# EAGLE board untitled (EAGLE 7.2.0)
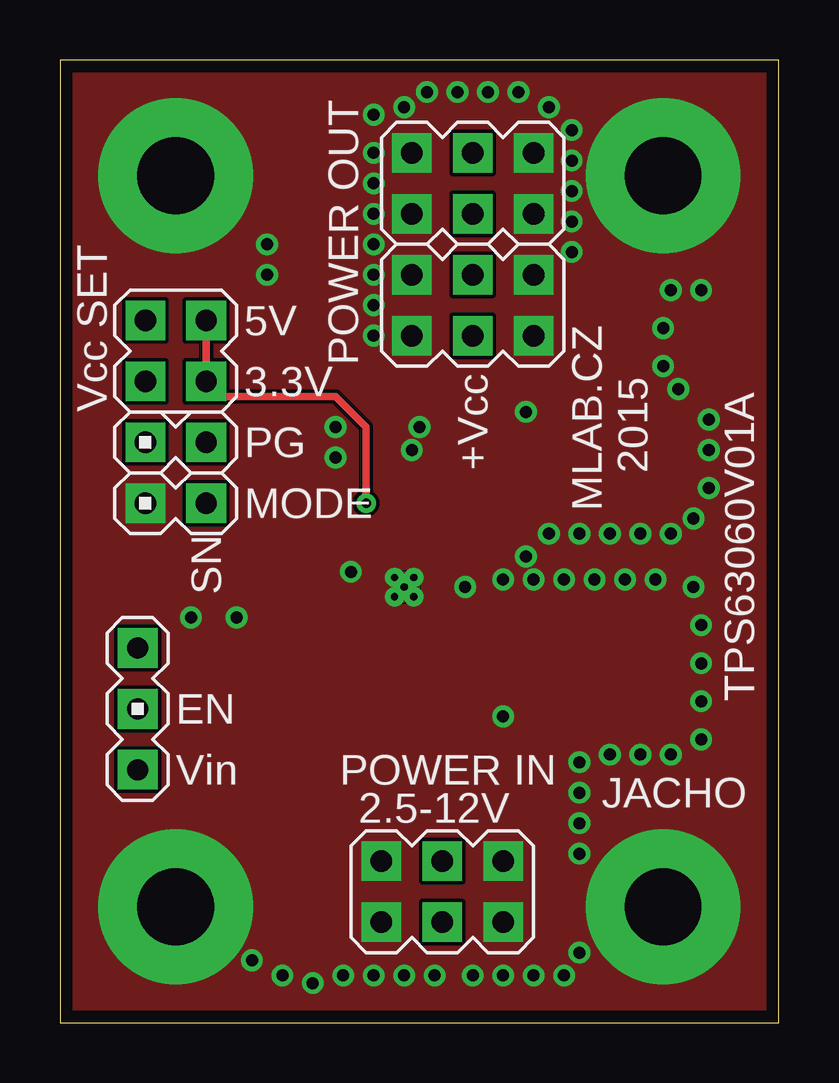
[diagram p0: board, top side]
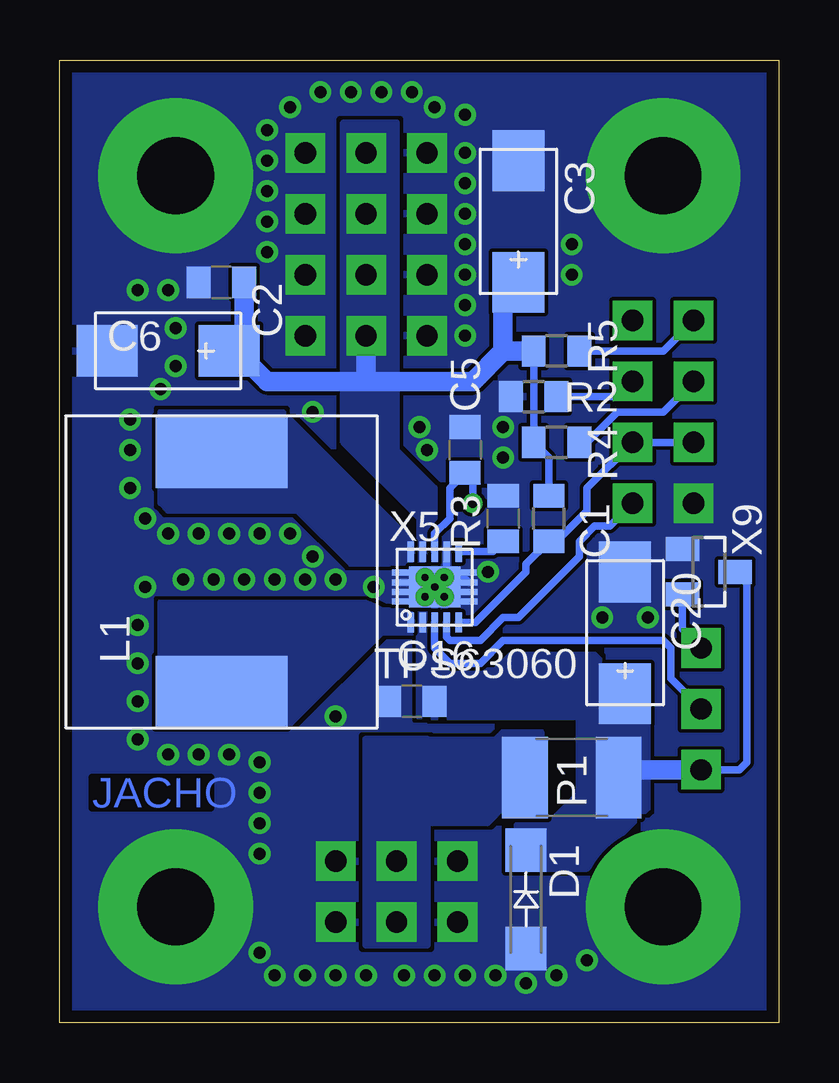
[diagram p1: board, bottom side, seen from below]

Size 29.97 x 40.13 mm. Coordinates in mm from the lower left corner, seen from the top.
Outline: 29.97,0 29.97,40.13 0,40.13 0,0 29.97,0
Copper layers (1*16): Top 0.035mm / dielectric 1.5mm / Bottom 0.035mm
Design rules "jacho": minimum track width 8mil, minimum drill 16mil, track to track 6mil, track to pad 6mil, pad to pad 6mil, via to via 6mil, smd to smd 6mil, copper to edge 20mil, drill to drill 8mil, minimum pad ring 10mil, minimum via ring 8mil, stop-mask expansion 4mil, vias tented up to drill 25mil, thermal gap 0mil

## Footprints (pad centres in the part's own frame; a part is rotated, then mirrored left to right if it is on the bottom)
C0805 = smd 0.991 x 1.295: 1 -0.95,0; 2 0.95,0
C = smd 2.54 x 2.159: + 2.54,0; - -2.54,0
SMA = smd 1.8 x 1.7: A -2.05,0; K 2.05,0
DE1205-10 = smd 3 x 5.5: P$1 -5,0; P$2 5,0
1812 = smd 1.9 x 3.4: 1 -1.95,0; 2 1.95,0
0805 = smd 0.991 x 1.295: 1 -0.95,0; 2 0.95,0
MA03-1 = drill 0.889 pad 1.651 square: 1 -2.54,0; 2 0,0; 3 2.54,0
MA03-2 = drill 0.889 pad 1.651 square: 1 -2.54,-1.27; 2 -2.54,1.27; 3 0,-1.27; 4 0,1.27; 5 2.54,-1.27; 6 2.54,1.27
MA02-2 = drill 0.889 pad 1.651 square: 1 -1.27,-1.27; 2 -1.27,1.27; 3 1.27,-1.27; 4 1.27,1.27
MA02-1 = drill 0.889 pad 1.651 square: 1 -1.27,0; 2 1.27,0
SROUB3M = drill 3.2 pad 6.452: P$1 0,0
SON10 = smd 0.28 x 0.85: 1 -1,-1.475; 2 -0.5,-1.475; 3 0,-1.475; 4 0.5,-1.475; 5 1,-1.475; 6 1,1.475; 7 0.5,1.475; 8 0,1.475; 9 -0.5,1.475; 10 -1,1.475 | smd 2.15 x 1.7: 11 0,0 | smd 0.7 x 0.25: 12 -1.425,-0.6; 13 -1.425,-0.2; 14 -1.425,0.2; 15 -1.425,0.6; 16 1.425,0.6; 17 1.425,0.2; 18 1.425,-0.2; 19 1.425,-0.6 | drill 0.3 pad 0.406: P$1 0,0; P$2 0.4,-0.4; P$3 0.4,0.4; P$4 -0.4,-0.4; P$5 -0.4,0.4
SOT23 = smd 1 x 1.4: 1 -0.95,-1.1; 2 0.95,-1.1; 3 0,1.1

## Placement (x,y rotation side)
C1  100nF  [C0805]  11.49,21.02 270 bottom
C2  10uF  [C0805]  23.24,30.86 0 bottom
C3  47u  [C]  10.86,33.4 270 bottom
C5  10p  [C0805]  13.08,23.88 90 bottom
C6  47u  [C]  25.46,28 0 bottom
C16  10uF  [C0805]  15.3,13.4 0 bottom
C20  47uF  [C]  6.41,16.26 270 bottom
D1  [SMA]  10.54,5.14 90 bottom
L1  DE1207-1  [DE1205-10]  23.24,18.8 90 bottom
P1  [1812]  8.64,10.22 0 bottom
R2  100k  [0805]  10.22,26.1 0 bottom
R3  1M  [0805]  9.59,21.02 90 bottom
R4  560k  [0805]  9.27,24.19 180 bottom
R5  900k  [0805]  9.27,28 180 bottom
SV1  [MA03-1]  3.24,13.08 270 top
SV2  [MA03-2]  17.21,29.91 0 top
SV3  [MA03-2]  15.94,5.46 180 top
SV4  [MA02-2]  4.83,28 90 top
SV5  [MA03-2]  17.21,34.99 180 top
SV6  MA02-1  [MA02-1]  4.83,21.65 180 top
SV7  MA02-1  [MA02-1]  4.83,24.19 180 top
X1  SROUB3M  [SROUB3M]  4.83,35.31 90 top
X2  SROUB3M  [SROUB3M]  4.83,4.83 90 top
X3  SROUB3M  [SROUB3M]  25.15,35.31 90 top
X4  SROUB3M  [SROUB3M]  25.15,4.83 90 top
X5  TPS63060  [SON10]  14.35,18.16 0 bottom
X9  [SOT23]  2.92,18.8 270 bottom

## Library data of the parts
C1-C3 C5 C6 C16 C20 = moje_C
D1 P1 X1-X4 = moje
L1 = moje_L
R2-R5 = moje_R
SV1-SV3 SV5 = moje_hrebinky; OC_FARNELL: unknown; OC_NEWARK: unknown
SV4 SV6 SV7 = moje_hrebinky
X5 X9 = moje_io

## Nets
+BAT2: C16.2 C20.+ D1.K P1.2 SV1.3 X5.2 X9.3
GND: C1.1 C2.1 C3.- C5.2 C6.- C16.1 C20.- D1.A R2.1 SV2.1 SV2.2 SV2.5 SV2.6 SV3.1 SV3.2 SV3.5 SV3.6 SV5.1 SV5.2 SV5.5 SV5.6 SV6.2 X1.P$1 X2.P$1 X3.P$1 X4.P$1 X5.7 X5.11 X5.12 X5.13 X5.14 X5.15 X5.16 X5.17 X5.18 X5.19 X5.P$1 X5.P$2 X5.P$3 X5.P$4 X5.P$5 X9.1
N$1: SV1.1 X9.2
N$3: SV1.2 X5.3
N$4: P1.1 SV3.3 SV3.4
N$5: C5.1 R2.2 SV4.1 SV4.3 X5.8
N$6: R3.1 SV7.1 SV7.2 X5.5
N$7: R4.1 SV4.2
N$8: C2.2 C3.+ C6.+ R3.2 R4.2 R5.2 SV2.3 SV2.4 SV5.3 SV5.4 X5.9
N$9: R5.1 SV4.4
N$13: SV6.1 X5.4
N$14: C1.2 X5.6
N$15: L1.P$1 X5.1
N$16: L1.P$2 X5.10

## Tracks (layer width: path | path; a pad name or v marks a point on that pad's centre or on a via)
+BAT2
  Bottom 0.305: SV1.3 1.65,10.54 1.33,10.86 1.33,18.31 X9.3
  Bottom 0.813: SV1.3 6.37,10.54 P1.2
  pour Bottom: 14.67,16.26 14.67,17.21 14.99,17.21 14.99,12.76 8.32,12.76 8.32,9.59 7.68,8.95 5.78,8.95 5.78,11.81 6.41,12.45 7.05,12.45 7.05,14.67 7.68,15.3 11.18,15.3 11.81,14.67 14.03,14.67 14.35,14.99 14.35,15.94
  pour Bottom: 10.86,6.41 8,6.41 5.46,8.95 5.46,12.45 8,12.45 8,11.81 8.32,11.49 8.32,9.59 9.59,8.32 10.86,8.32 11.18,8 11.18,7.05
GND  (via drill 0.5)
  Bottom 0.305: X5.7 13.85,18.61 13.72,18.48 | 13.72,18.48 14.03,18.48 X5.P$1 14.55,18.36 X5.14 | 13.72,18.48 13.04,18.48 X5.17
  other vias: 8.64,32.45 8.64,31.18 14.99,24.83 14.67,23.88 11.49,23.56 11.49,24.83 13.08,28.64 13.08,29.91 13.08,31.18 13.08,32.45 13.08,33.72 13.08,34.99 13.08,36.26 13.08,37.85 14.35,38.16 15.3,38.8 16.57,38.8 17.84,38.8 19.11,38.8 20.38,38.16 21.34,32.13 21.34,33.4 21.34,34.67 21.34,35.94 21.34,37.21 17.21,1.97 18.48,1.97 19.75,1.97 21.02,1.97 21.65,2.92 21.65,7.05 21.65,8.32 21.65,9.59 21.65,10.86 15.62,1.97 14.35,1.97 13.08,1.97 11.81,1.97 10.54,1.65 9.27,1.97 8,2.6 16.89,18.16 18.48,18.48 19.43,19.43 20.38,20.38 19.75,18.48 21.02,18.48 22.29,18.48 21.65,20.38 22.92,20.38 24.19,20.38 25.46,20.38 23.56,18.48 24.83,18.48 26.42,18.16 26.73,16.57 26.73,14.99 26.73,13.4 26.73,11.81 25.46,11.18 24.19,11.18 22.92,11.18 26.42,21.02 27.05,22.29 27.05,23.88 27.05,25.15 26.73,30.54 25.78,26.42 19.43,25.46 25.15,27.37 25.15,28.96 25.46,30.54 12.13,18.8 5.46,16.89 7.37,16.89 18.48,12.76
  pour Bottom (rank 2): -0.57,-1.21 31.18,-1.21 31.18,41.02 -0.89,41.02 -1.52,-2.16
  pour Top (rank 2): -0.25,-0.57 30.86,-0.57 30.86,40.7 -0.89,40.7 -0.89,0.38 -0.25,-0.25
N$1
  Bottom 0.305: X9.2 4.02,16.4 SV1.1
N$3
  Bottom 0.305: X5.3 14.35,15.62 13.72,14.99 12.45,14.99 11.49,15.94 4.83,15.94 4.51,15.62 4.51,14.35 SV1.2
N$4
  pour Bottom: 15.3,8.32 15.3,11.49 14.99,11.81 11.81,11.81 11.49,12.13 9.91,12.13 9.91,8.95 11.49,8.95 12.13,8.32
  pour Bottom: 14.67,3.24 14.67,11.81 17.21,11.81 17.21,3.24
N$5  (via drill 0.4)
  Top 0.305: SV4.3 SV4.1 6.73,26.1 11.49,26.1 12.76,24.83 v12.76,21.65
  Bottom 0.305: X5.8 14.35,20.38 13.72,21.02 13.72,22.29 C5.1 12.76,22.61 v12.76,21.65 | R2.2 6.73,26.1 SV4.1
N$6
  Bottom 0.305: X5.5 12.65,16.69 10.54,18.8 10.54,19.12 R3.1 9.27,20.07 8,21.34 8,22.29 SV7.1 SV7.2
N$7
  Bottom 0.305: R4.1 8,24.19 6.73,25.46 4.83,25.46 SV4.2
N$8
  Bottom 0.305: R3.2 9.59,23.56 R4.2 R5.2
  Bottom 0.813: C6.+ 22.29,28.64 C2.2 22.29,27.69 21.34,26.73 17.21,26.73 | 17.21,26.73 SV2.3 | 17.21,26.73 12.76,26.73 11.49,28 | 11.49,28 R5.2 | 11.49,28 11.49,30.23 C3.+
  pour Bottom: 14.99,19.11 14.99,21.02 18.16,24.19 18.16,37.53 15.94,37.53 15.94,23.88 14.35,22.29 14.35,21.02 14.67,20.7 14.67,19.11
N$9
  Bottom 0.305: R5.1 4.83,28 SV4.4
N$13
  Bottom 0.305: X5.4 13.85,16.07 13.72,15.94 12.45,15.94 11.49,16.89 10.86,16.89 8.32,19.43 8.32,20.07 7.68,20.7 7.05,20.7 SV6.1
N$14
  Bottom 0.305: X5.6 11.93,19.64 C1.2
N$15
  pour Bottom: 15.3,16.26 16.57,16.26 20.38,12.45 25.78,12.45 25.78,17.53 17.21,17.53 16.57,17.21 15.3,17.21
N$16
  pour Bottom: 15.3,19.11 17.84,19.11 20.07,21.34 25.46,21.34 25.78,21.65 25.78,25.46 20.7,25.46 15.3,20.07

## Text on the board
Bottom: JACHO
tPlace: POWER OUT | 5V | +Vcc | Vcc SET | 3.3V | PG | 2015 | MLAB.CZ | MODE | SN | TPS63060V01A | EN | POWER IN | Vin | JACHO | 2.5-12V